# EAGLE board motherboard (EAGLE 6.1)
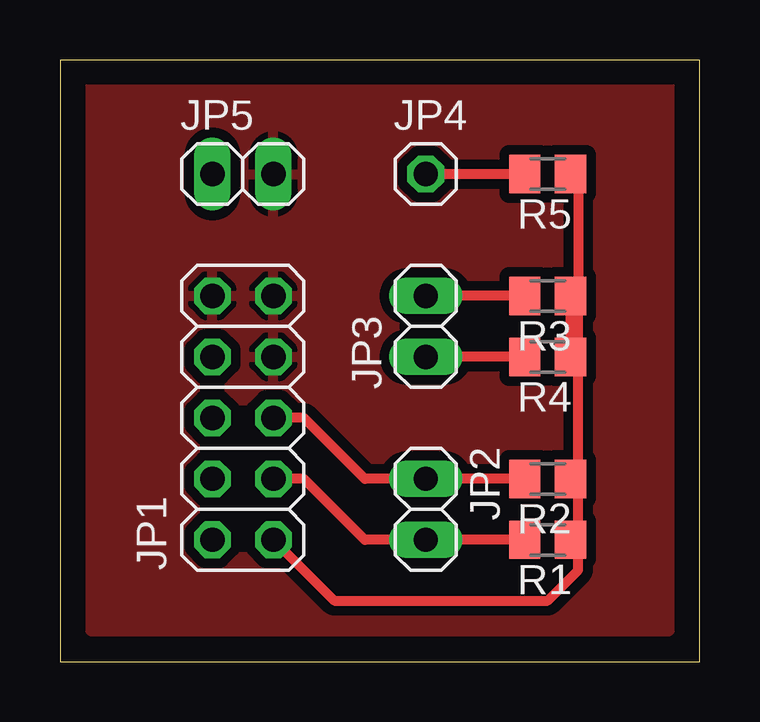
[diagram p0: board, top side]
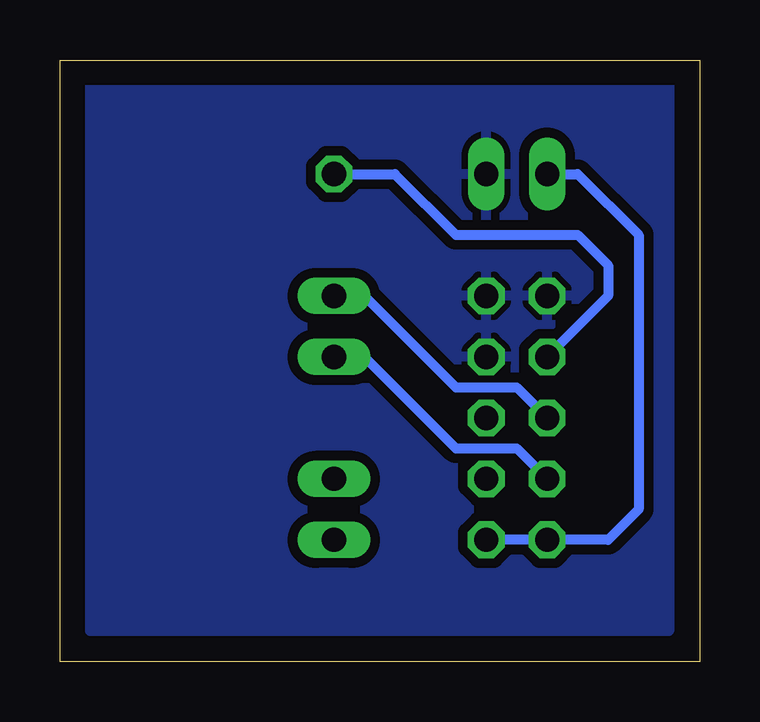
[diagram p1: board, bottom side, seen from below]

Size 26.65 x 25.07 mm. Coordinates in mm from the lower left corner, seen from the top.
Outline: 0,0 26.65,0 26.65,25.07 0,25.07 0,0
Copper layers (1*16): Top 0.035mm / dielectric 1.5mm / Bottom 0.035mm
Design rules: minimum track width 10mil, minimum drill 24mil, track to track 8mil, track to pad 8mil, pad to pad 8mil, via to via 8mil, smd to smd 8mil, copper to edge 40mil, drill to drill 8mil, minimum pad ring 10mil, minimum via ring 8mil, stop-mask expansion 4mil, vias tented up to drill 0mil, thermal gap 10mil
Net classes: 0 default: width 0.203 mm, drill 0.203 mm, clearance 0.203 mm

## Footprints (pad centres in the part's own frame; a part is rotated, then mirrored left to right if it is on the bottom)
2X05 = drill 1.016 octagon: 1 -5.08,-1.27; 2 -5.08,1.27; 3 -2.54,-1.27; 4 -2.54,1.27; 5 0,-1.27; 6 0,1.27; 7 2.54,-1.27; 8 2.54,1.27; 9 5.08,-1.27; 10 5.08,1.27
1X02 = drill 1.016 long: 1 -1.27,0; 2 1.27,0
1X01 = drill 1.016 octagon: 1 0,0
M0805 = smd 1.3 x 1.6: 1 -0.95,0; 2 0.95,0

## Placement (x,y rotation side)
JP1  [2X05]  7.62,10.16 90 top
JP2  [1X02]  15.24,6.35 270 top
JP3  [1X02]  15.24,13.97 90 top
JP4  [1X01]  15.24,20.32 0 top
JP5  [1X02]  7.62,20.32 0 top
R1  [M0805]  20.32,5.08 180 top
R2  [M0805]  20.32,7.62 180 top
R3  [M0805]  20.32,15.24 180 top
R4  [M0805]  20.32,12.7 180 top
R5  [M0805]  20.32,20.32 180 top

## Library data of the parts
JP1-JP5 = pinhead
R1-R5 = resistor

## Nets
3V3: JP1.1 JP1.2 JP5.1 R1.1 R2.1 R3.1 R4.1 R5.1
ERROR: JP1.8 JP4.1 R5.2
GND: JP1.7 JP1.9 JP1.10 JP5.2
SCL1: JP1.4 JP3.1 R4.2
SCL2: JP1.5 JP2.1 R2.2
SDA1: JP1.6 JP3.2 R3.2
SDA2: JP1.3 JP2.2 R1.2

## Tracks (layer width: path | path; a pad name or v marks a point on that pad's centre or on a via)
3V3
  Top 0.406: JP1.1 11.43,2.54 20.32,2.54 21.59,3.81 21.59,5.08 | 21.59,5.08 21.59,7.62 | 21.59,7.62 21.59,15.56 | R4.1 R3.1 21.59,15.56 | R5.1 21.59,20.32 21.59,15.56 | R2.1 21.59,7.62 | R1.1 21.59,5.08
  Bottom 0.406: JP5.1 5.08,20.32 2.54,17.78 2.54,6.35 3.81,5.08 JP1.2 JP1.1
ERROR
  Top 0.406: R5.2 JP4.1
  Bottom 0.406: JP4.1 12.7,20.32 10.16,17.78 5.08,17.78 3.81,16.51 3.81,15.24 JP1.8
GND
  pour Top (isolate 0.406): 1.27,24.13 1.27,1.27 25.4,1.27 25.4,24.13
  pour Bottom (isolate 0.406): 1.27,24.13 1.27,1.27 25.4,1.27 25.4,24.13
SCL1
  Top 0.406: R4.2 JP3.1
  Bottom 0.406: JP3.1 13.97,12.7 10.16,8.89 7.62,8.89 JP1.4
SCL2
  Top 0.406: R2.2 JP2.1 12.7,7.62 10.16,10.16 JP1.5
SDA1
  Top 0.406: R3.2 JP3.2
  Bottom 0.406: JP3.2 13.97,15.24 10.16,11.43 7.62,11.43 JP1.6
SDA2
  Top 0.406: R1.2 JP2.2 12.7,5.08 10.16,7.62 JP1.3